# Altium PCB Phototransistor Board.PcbDoc
Units mm, origin at the board's own origin, x right, y up, seen from the top; angles counter-clockwise.
Board outline 11 x 16 mm, 2 copper layers (Top Layer, Bottom Layer); 7 components, 4 nets, 18 pads, 0 vias.
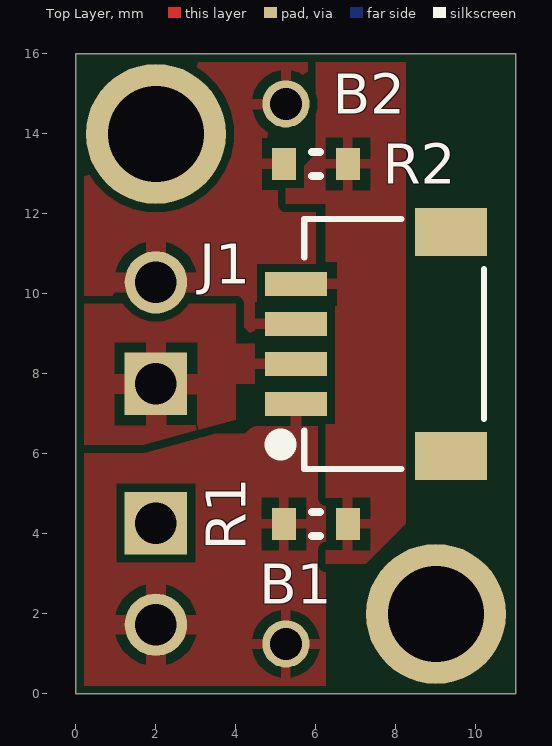
[diagram p0: Top Layer view]
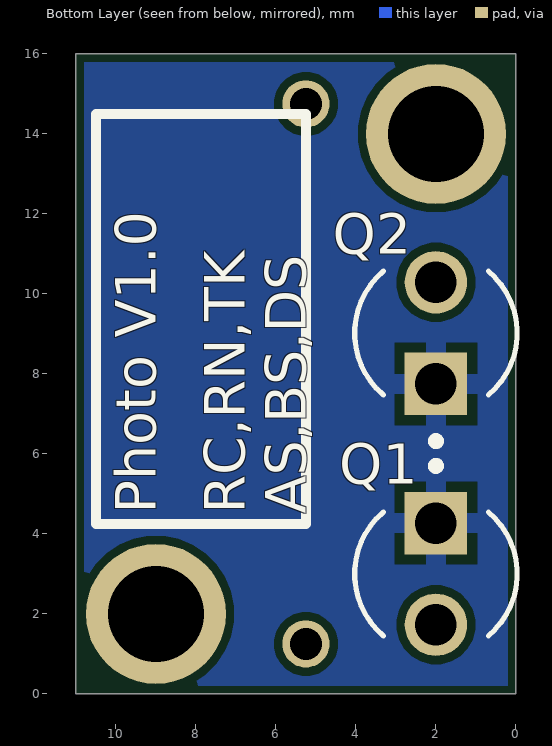
[diagram p1: Bottom Layer view, seen from below]

## Layer stack, top to bottom
Top Solder: solder mask 0.0102, Solder Resist, Dk 3.5
Top Layer: signal copper 0.0356
Dielectric 1: dielectric 0.32, FR-4, Dk 4.8
Bottom Layer: signal copper 0.0356
Bottom Solder: solder mask 0.0102, Solder Resist, Dk 3.5

## Board outline
0,0 11,0 11,16 0,16

## Design rules (kind name [scope] priority, off if disabled: settings)
BoardOutlineClearance [All] p1: gap=0.2 ignorepadtopadclearanceinfootprint=FALSE except(0.4: Arc-SplitBarrior Arc-SplitContinuation Track-SplitBarrior Track-SplitContinuation SMDPad-SplitBarrior SMDPad-SplitContinuation THPad-SplitBarrior THPad-SplitContinuation Via-SplitBarrior Via-SplitContinuation Fill-SplitBarrior Fill-SplitContinuation Poly-SplitBarrior Poly-SplitContinuation Region-SplitBarrior Region-SplitContinuation Text-SplitBarrior Text-SplitContinuation)
Clearance "Clearance Bottom Layer" [OnLayer('Bottom Layer')] p1: gap=0.203 ignorepadtopadclearanceinfootprint=TRUE except(0.254: Arc-Text Track-Text SMDPad-Text THPad-Text Via-Text Fill-Text Poly-Text Region-Text Text-Text)
Clearance "Clearance Top Layer" [OnLayer('Top Layer')] p2: gap=0.203 ignorepadtopadclearanceinfootprint=TRUE except(0.254: Arc-Text Track-Text SMDPad-Text THPad-Text Via-Text Fill-Text Poly-Text Region-Text Text-Text)
Clearance [All] p3: gap=0.2 ignorepadtopadclearanceinfootprint=FALSE except(0.089: Arc-Arc Arc-Track Arc-SMDPad Track-Track Track-SMDPad SMDPad-SMDPad; 0.127: Arc-Via Track-Via SMDPad-Via THPad-Via Via-Via; 0.254: Arc-Text Track-Text SMDPad-Text THPad-Text Via-Text Fill-Text Poly-Text Region-Text Text-Text)
HoleSize [All] p1: absolutevalues=TRUE maxlimit=6.3 minlimit=0.2 maxpercent=80.000 minpercent=20.000
MinimumAnnularRing [All] p1: minimumring=0.076
MinimumSolderMaskSliver [All] p1: minsoldermaskwidth=0.1
PolygonConnect [HasFootprint('IRLEDFOOTPRINT')] p1: connectstyle=Relief reliefconductorwidth=0.508 reliefentries=4 polygonreliefangle="90 Angle" airgapwidth=0.254
PolygonConnect PolygonConnect_1 [All] p2: thpad.connectstyle=Relief thpad.reliefconductorwidth=0.254 thpad.reliefentries=4 thpad.polygonreliefangle="90 Angle" thpad.airgapwidth=0.254 smdpad.connectstyle=Relief smdpad.reliefconductorwidth=0.254 smdpad.reliefentries=4 smdpad.polygonreliefangle="90 Angle" smdpad.airgapwidth=0.254 via.connectstyle=Direct via.reliefconductorwidth=0.508 via.reliefentries=4 via.polygonreliefangle="90 Angle" via.airgapwidth=0.254
RoutingCorners [All] p1: cornerstyle=Round minsetback=2.54 maxsetback=2.54
RoutingVias [All] p1: holewidth=0.5 width=1 viastyle="Through Hole" minholewidth=0.2 minwidth=0.45 maxholewidth=1 maxwidth=2
SilkToSilkClearance [All] p1: silktosilkclearance=0.1
SilkToSolderMaskClearance [IsPad] p1: minsilkscreentomaskgap=0.1 clearancetoexposedcopper=TRUE
SolderMaskExpansion [All] p1: expansion=0.102 istentingtop=FALSE
Width [All] p1: maxlimit=2.54 minlimit=0.089 preferedwidth=0.381
25 further rules are at their usual default settings.

## Components (designator, comment, footprint, x,y, rotation, side; value= is the part's Value field where it differs from the comment)
B1 "Test Point (Via)" TP#1 5.25,1.25 r0 top
B2 "Test Point (Via)" TP#2 5,15 r0 top
J1 "SM04B-SRSS-TB(LF)(SN)" CONN_SM04B_JST 5.5,7.25 r90 top
Q1 "TEFT4300" IRLEDFOOTPRINT 2,3 r270 bottom
Q2 "TEFT4300" IRLEDFOOTPRINT 2,9.02 r90 bottom
R1 "470k" 0603 6,4.25 r180 top
R2 "470k" 0603 6,13.25 r180 top

## Footprints (in the part's own frame and the unit in brackets; to place one, negate y for a bottom-side part, rotate by r counter-clockwise, add the part's x,y. Pads: shape width x height; smd on the part's side, far side on the other; paste and mask are expansions set on the pad)
0603 [mm] "Chip Resistor, 2-Leads, Body 1.60x0.80mm, IPC High Density"
  rect 0.6x0.8 smd mask+0.1: 1(-0.8,0) 2(0.8,0)
  silkscreen extent -0.1,-0.3 0.1,0.3, body extent -0.8,-0.4 0.8,0.4, height 0.6
CONN_SM04B_JST [mm]
  rect 1.2x1.8 smd: 0(-1.3,-3.875) 0(4.3,-3.875)
  rect 0.6x1.55 smd: 1(0,0) 2(1,0) 3(2,0) 4(3,0)
  silkscreen extent -1.62,-4.7 4.62,0.38, body extent -1.5,-4.58 4.5,0.37, height 2.96
IRLEDFOOTPRINT [mm]
  round 1.56 hole 1.04: C(1.27,0)
  rect 1.56x1.56 hole 1.04: E(-1.27,0)
  silkscreen extent -2.8,-2.03 1.55,2.03
TP#1 [mm] "Test point (40mil Standard)"
  round 1.181 hole 0.8: 1(0,0)
TP#2 [mm] "Test point (40mil Standard)"
  round 1.181 hole 0.8: 1(0.25,-0.25)

## Part data
J1: library part "CN HDR 4POS JST SH_SR", "CONN HEADER SMD R/A 4POS 1MM", Mfr_Name=JST, Supplier Part Number 1=455-1804-1-ND, Copyright="Copyright (C) 2023 Ultra Librarian. All rights reserved.", Digi-Key_Part_Number_1=455-1804-2-ND, Digi-Key_Part_Number_2=455-1804-1-ND, Digi-Key_Part_Number_3=455-1804-6-ND, Manufacturer_Part_Number=SM04B-SRSS-TB(LF)(SN), Part Number="CN HDR 4POS JST SH_SR", Pin Count=4, RefDes=RefDes, Supplier 1=Digi-Key, Supplier URL 1=https://www.digikey.ca/en/products/detail/jst-sales-america-inc/SM04B-SRSS-TB-LF-SN/926710, Type=DEV
Q1 Q2: "Phototransistor 925nm Top View Radial, 3mm Dia _T-1_", Package="Radial Vishay", Availability=Unavailable, MF="Vishay Semiconductor", MP=TEFT4300, Part Number=TEFT4300, Price=None, SnapEDA_Link=https://www.snapeda.com/parts/TEFT4300/Vishay%20Semiconductor%20Opto%20Division/view-part/213585/?ref=snap
R1 R2: library part "RES 470k 1/8W", "Default Resistor Symbol", Package=0805, Power (Watts)=0.125W, Tolerance=5%, Part Number="RES 470k 1/8W"
B1 B2: Part Number="Test Point (Via)"

## Free pads (board coordinates)
  round 3.5 hole 2.4: M2(2,14) M2(9,2)

## Nets (pads, with @x,y where several pads share a name; then routed paths per layer and width w, separated by ;. In a path a pad name is that pad's centre, name@x,y a point inside that pad or via, vN(x,y) a via of type N, cw(c..) or ccw(c..) an arc to the next point about the centre after c; other vN are vias at no path point)
3V3: J1.4 R1.1 R2.1
BKBM1: B1.1 J1.1 Q1.C R1.2
BKBM2: B2.1 J1.3 Q2.C R2.2
GND: J1.2 Q1.E Q2.E
pads on no net: J1.0

## Polygon pours and split planes (outlines as drawn)
GND on Bottom Layer "GND_L02_P019" (solid, pour order 19): -0.75,16.25 11.75,16.25 11.75,-0.75 11.5,-1 -1.25,-1 -1.25,15.75
BKBM2 on Top Layer "BKBM2_L01_P017" (solid, pour order 17): 4,9.375 4.375,9 6.25,9 6.25,9.625 6,9.875 6,15.625 5.5,16.125 0,16.125 0,9.875 4,9.875
GND on Top Layer "GND_L01_P015" (solid, pour order 15): 4,8.75 6.25,8.75 6.25,7.75 4,7.75 4,6.858 1.693,6.229 -0.062,6.229 -0.062,9.5 0.188,9.75 4,9.75
BKBM1 on Top Layer "BKBM1_L01_P018" (solid, pour order 18): 4.221,6.5 4.5,6.779 4.5,7.75 6.25,7.75 6.25,0 0,0 0,6.229 2.081,6.5
3V3 on Top Layer "3V3_L01_P016" (solid, pour order 16): 6,13.5 5.25,12.75 5.25,12.25 6.25,12.25 6.25,3.25 7.25,3.25 8.25,4.25 8.25,16 6,16

## Silkscreen, mask and mechanical layers (free items; w line width, h text height)
Bottom Overlay:
  lines w0.254: 5.25,4.25 10.5,4.25 10.5,14.5 5.25,14.5 5.25,4.25
  text "RC,RN,TK  / AS,BS,DS" at 5.25,4.5 h1.02 r270
  text "Photo V1.0" at 9,4.5 h1.02 r270
Board Shape:
  the board outline again, w0.254

## Dimensions
11,0 to 9,2 on Dimensions
9,2 to 11,0 on Dimensions
2,14 to 0,16 on Dimensions
0,16 to 2,14 on Dimensions
2,1.73 to 0,0 on Dimensions
0,0 to 4.3,3 on Dimensions
0,0 to 2.25,9 on Dimensions
11,16 to 11,0 on Dimensions
0,16 to 11,16 on Dimensions